# Altium PCB Complete.PcbDoc
Units mil, origin at the board's own origin, x right, y up, seen from the top; angles counter-clockwise.
Board outline 3476.38 x 2055.12 mil, 2 copper layers (Top Layer, Bottom Layer); 46 components, 14 nets, 138 pads, 274 vias.
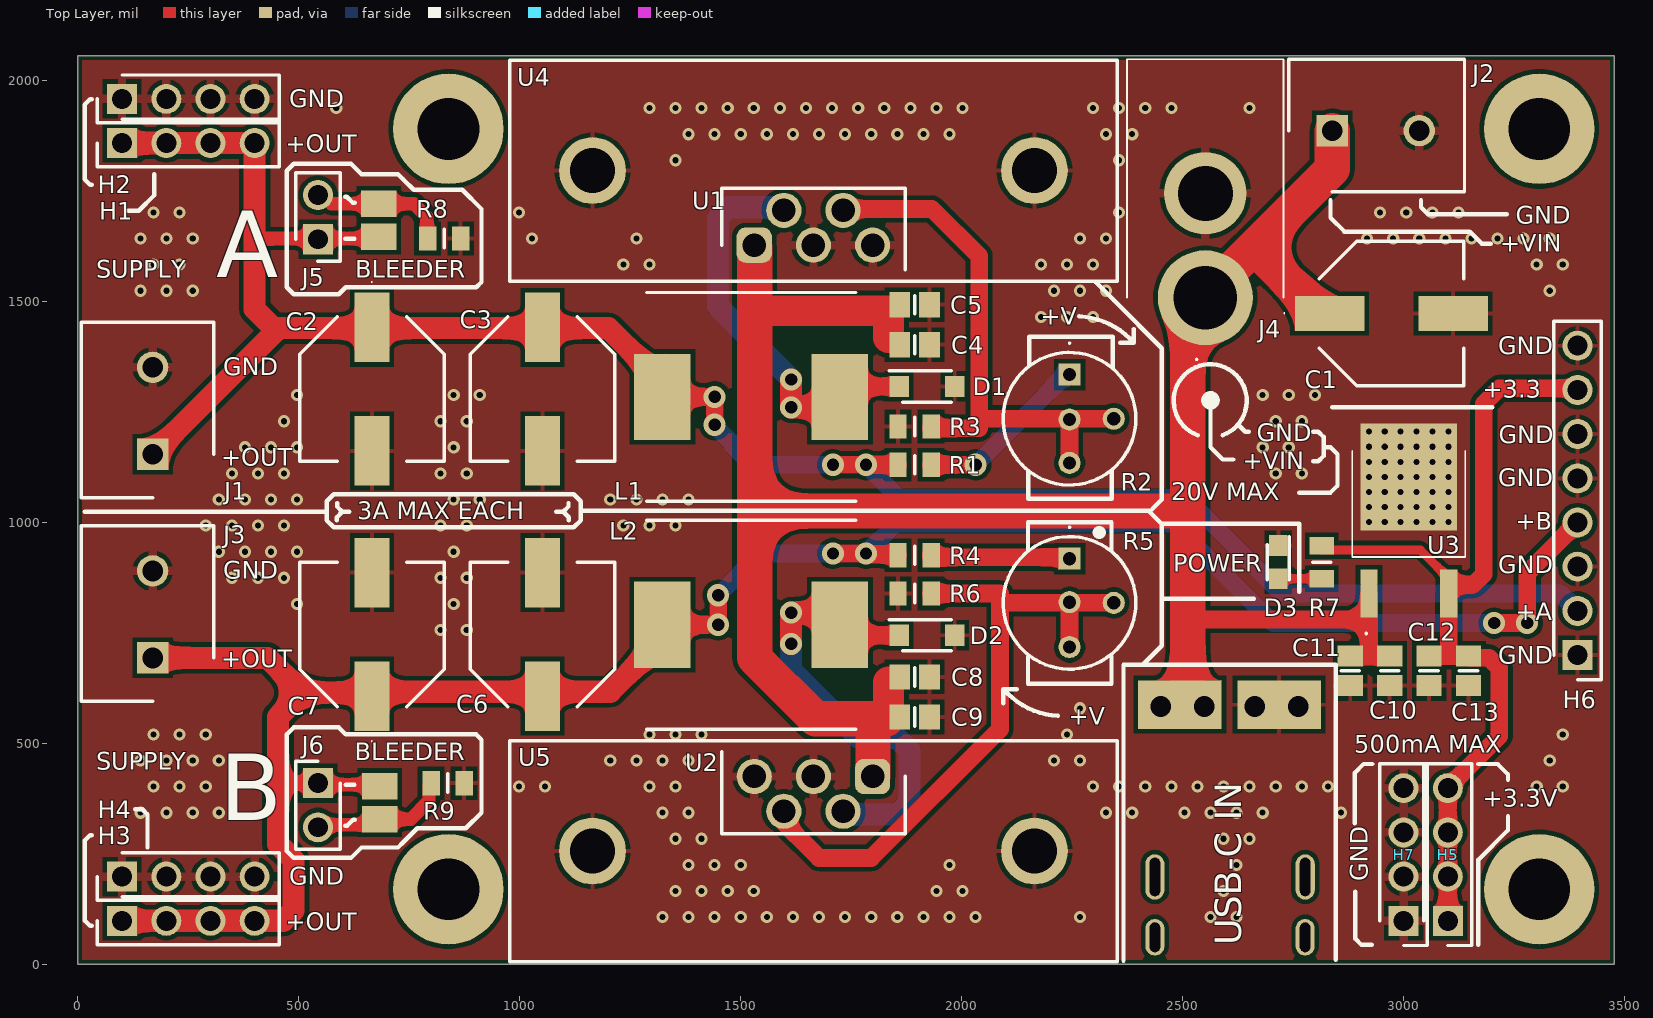
[diagram p0: Top Layer view]
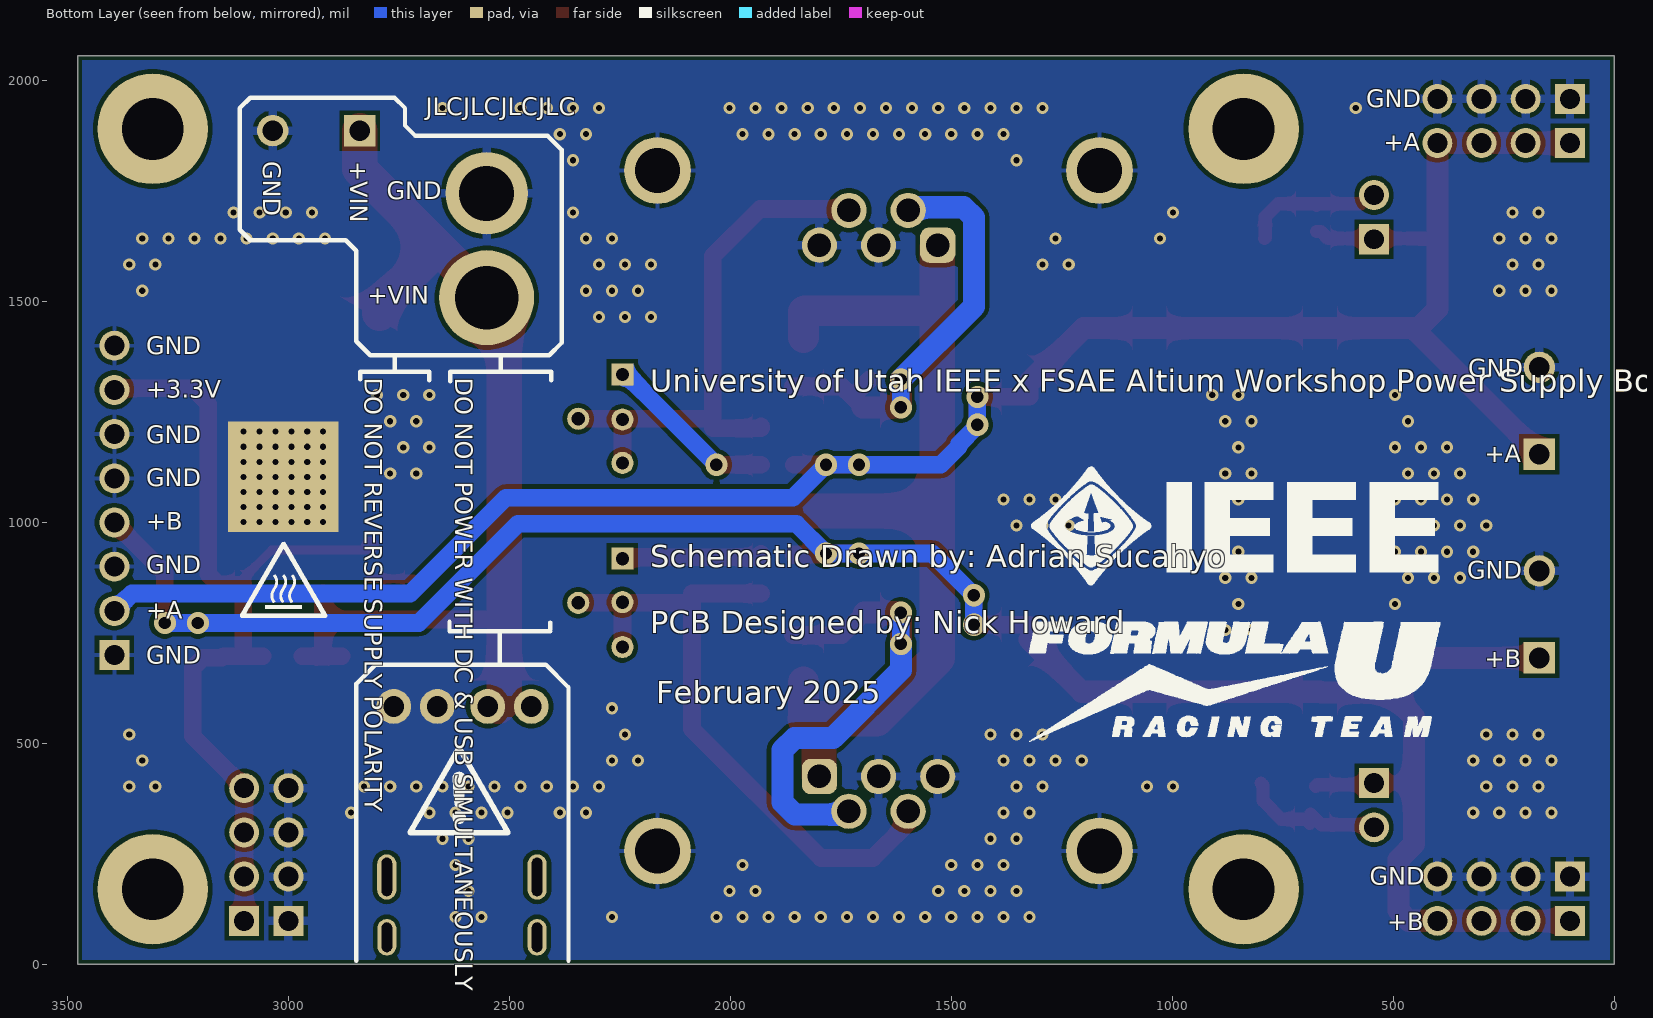
[diagram p1: Bottom Layer view, seen from below]
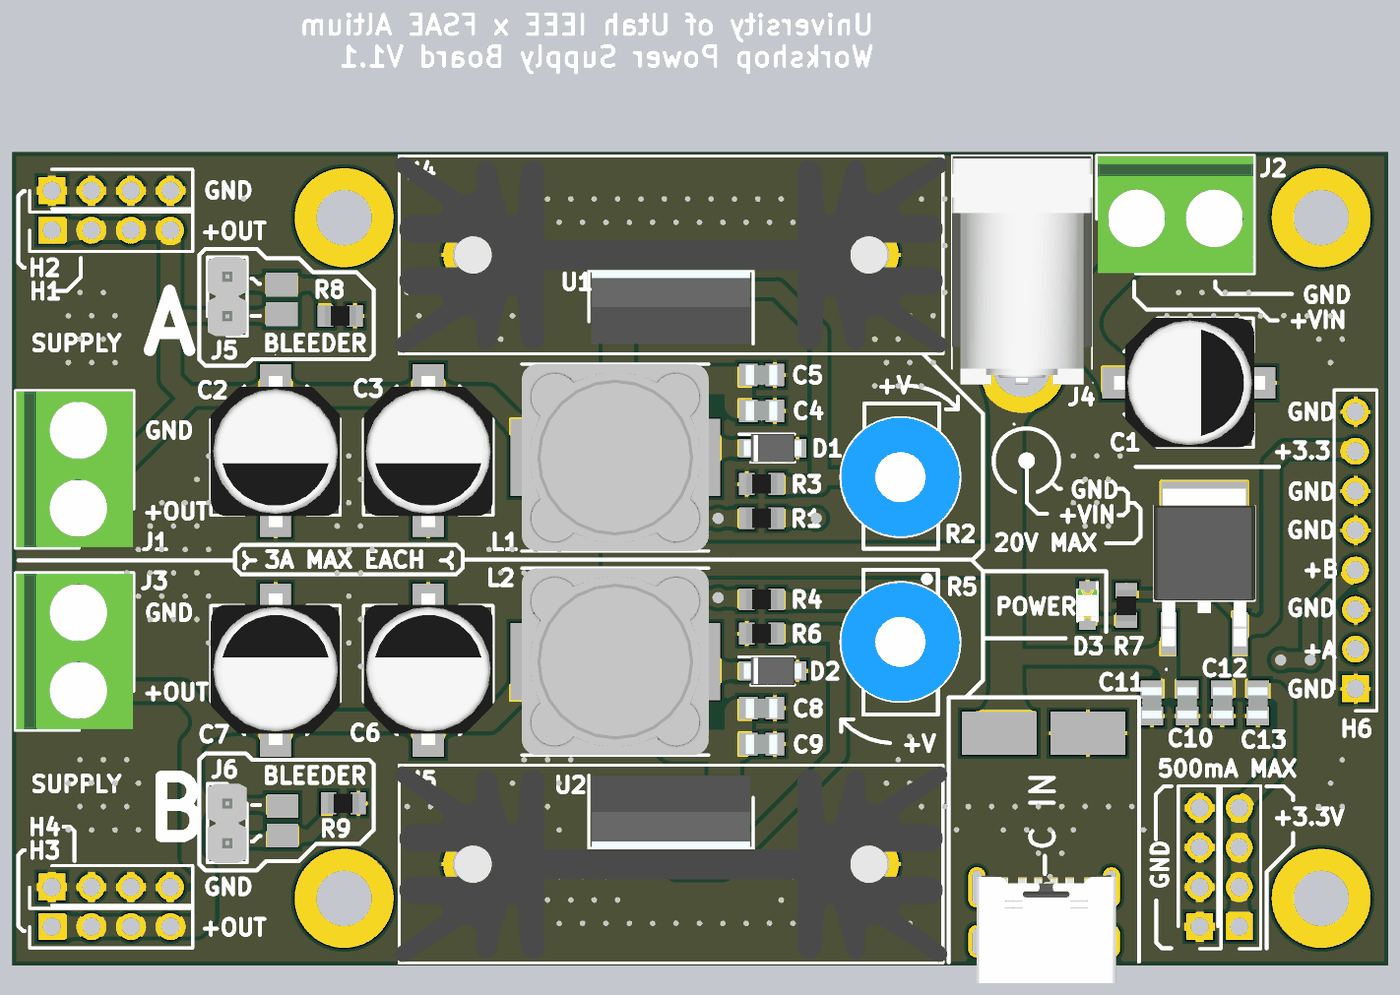
[diagram p2: 3D render of the assembled board from above, using the file's embedded part models]

## Layer stack, top to bottom
Top Solder: solder mask 0.4, Solder Resist, Dk 3.5
Top Layer: signal copper 1.4
Dielectric 1: dielectric 12.6, FR-4, Dk 4.8
Bottom Layer: signal copper 1.4
Bottom Solder: solder mask 0.4, Solder Resist, Dk 3.5

## Board outline
0,0 0,2055.12 3476.38,2055.12 3476.38,0

## Design rules (kind name [scope] priority, off if disabled: settings)
Clearance [All] p1: gap=10 ignorepadtopadclearanceinfootprint=TRUE except(0: Arc-Hole Track-Hole SMDPad-Hole THPad-Hole Via-Hole Fill-Hole Poly-Hole Region-Hole Text-Hole)
ComponentClearance [All] p1: gap=0 collisioncheckmode=3 verticalgap=10 showdistances=FALSE
Height [All] p1: minheight=0 maxheight=10000 prefheight=500
HoleSize [All] p1: absolutevalues=TRUE maxlimit=1000 minlimit=1 maxpercent=80.000 minpercent=20.000
PolygonConnect [All] p1: connectstyle=Relief reliefconductorwidth=10 reliefentries=4 polygonreliefangle="90 Angle" airgapwidth=10
RoutingVias [All] p1: holewidth=28 width=50 viastyle="Through Hole" minholewidth=28 minwidth=50 maxholewidth=28 maxwidth=50
SolderMaskExpansion [All] p1: expansion=4 istentingtop=FALSE
Width [All] p1: maxlimit=100 minlimit=10 preferedwidth=50
27 further rules are at their usual default settings.

## Components (designator, comment, footprint, x,y, rotation, side; value= is the part's Value field where it differs from the comment)
C1 "EEE-FN1V271UP" EEHZT1E331UP 2972.44,1472.44 r0 top
C2 "EEE-FN1V271UP" EEHZT1E331UP 665.35,1301.18 r270 top
C3 "EEE-FN1V271UP" EEHZT1E331UP 1051.18,1301.18 r270 top
C4 "1u" CAP0805 1893.31,1401.57 r0 top
C5 "100n" CAP0805 1893.31,1492.13 r0 top
C6 "EEE-FN1V271UP" EEHZT1E331UP 1051.18,746.06 r90 top
C7 "EEE-FN1V271UP" EEHZT1E331UP 665.35,746.06 r90 top
C8 "1u" CAP0805 1893.31,649.85 r0 top
C9 "100n" CAP0805 1893.31,559.06 r0 top
C10 "1u" CAP0805 2968.5,663.39 r270 top
C11 "100n" CAP0805 2879.27,663.39 r270 top
C12 "100n" CAP0805 3057.74,663.39 r270 top
C13 "1u" CAP0805 3146.98,663.39 r270 top
D1 "V3FM10-M3_H" DO-219AB 1921.26,1307.09 r0 top
D2 "V3FM10-M3_H" DO-219AB 1921.26,744.09 r0 top
D3 "LED" LEDM2012X80N 2716.54,909.45 r270 top
H1 "Header" Header_1X4 100,1857.9 r0 top
H2 "Header" Header_1X4 100,1957.9 r0 top
H3 "Header" Header_1X4 100,97.9 r0 top
H4 "Header" Header_1X4 100,197.9 r0 top
H5 "Header" Header_1X4 3100,97.9 r90 top
H6 "Header" Header_1X8 3393.7,699.21 r90 top
H7 "Header" Header_1X4 3000,97.9 r90 top
J1 "691137710002" SHDR2W70P0X500_1X2_1000X750X1160P 169.29,1153.54 r90 top
J2 "691137710002" SHDR2W70P0X500_1X2_1000X750X1160P 2838.58,1885.83 r0 top
J3 "691137710002" SHDR2W70P0X500_1X2_1000X750X1160P 169.29,692.91 r90 top
J4 "PJ-037AH" PJ037AH 2551.18,1507.87 r270 top
J5 "90120-0762" HDRV2W35P0X254_1X2_508X249X560P 543.31,1640.16 r90 top
J6 "90120-0762" HDRV2W35P0X254_1X2_508X249X560P 543.31,409.45 r270 top
L1 "SRR1210-151M" INDPM120120X1000N-D 1523.62,1283.46 r180 top
L2 "SRR1210-151M" INDPM120120X1000N-D 1523.62,767.72 r180 top
R1 "750" RESC0805 1893.31,1129.92 r0 top
R2 "50k" 3339P1103LF 2244.03,1334 r270 top
R3 "3.3k" RESC0805 1893.31,1216.54 r180 top
R4 "750" RESC0805 1893.31,925.2 r0 top
R5 "50k" 3339P1103LF 2244.09,917.32 r270 top
R6 "3.3k" RESC0805 1893.31,838.58 r180 top
R7 "750" RESC0805 2814.96,909.45 r270 top
R8 "3.3k" RESC0805 828.74,1641.73 r0 top
R9 "3.3k" RESC0805 836.61,409.45 r0 top
U1 "LM2576WT" TO-220-5 1530.63,1626.73 r0 top
U2 "LM2576WT" TO-220-5 1798.35,424.45 r180 top
U3 "UA78M33CKVURG3" TO-252-3 3011.81,838.58 r90 top
U4 "637-10ABPE" 63710ABPE 2164.49,1795.47 r180 top
U5 "637-10ABPE" 63710ABPE 1164.49,255.71 r0 top
"USB-C IN" "USB-PD" USB_C-PD 2395.41,649.85 r0 top (schematic designator M1)

## Footprints (in the part's own frame and the unit in brackets; to place one, negate y for a bottom-side part, rotate by r counter-clockwise, add the part's x,y. Pads: shape width x height; smd on the part's side, far side on the other; paste and mask are expansions set on the pad)
3339P1103LF [mil]
  rect 50x50 hole 30: 1(0,0)
  round 50 hole 30: 2(100,100) 3(200,0)
  silkscreen extent -73,-150 250,150, body extent -50,-150 250,150, height 253
63710ABPE [mm]
  round 3.84 hole 2.6: 1(0,0) 2(25.4,0)
  silkscreen extent -4.75,-6.35 30.15,6.35, body extent -5.03,-6.29 30.43,6.29, height 25.7
CAP0805 [mm] "Chip Capacitor, 2-Leads, Body 2.00x1.20mm, IPC Medium Density"
  rect 1.2x1.45 smd: 1(-0.85,0) 2(0.85,0)
  silkscreen extent 0,-0.53 0,0.53, body extent -1,-0.63 1,0.63, height 1.1
DO-219AB [mm]
  rect 1.12x1.22 smd: 1(-1.6,0) 2(1.6,0)
  silkscreen extent -2.16,-0.9 1.4,0.9, body extent -1.85,-0.9 1.85,0.9, height 1.08
EEHZT1E331UP [mm]
  rect 4x2 smd: 1(-3.55,0) 2(3.55,0)
  silkscreen extent -6.18,-4.15 4.15,4.15, body extent -4.79,-4.15 4.91,4.15, height 10.2
HDRV2W35P0X254_1X2_508X249X560P [mil]
  rect 68x68 hole 45: 1(0,0)
  round 68 hole 45: 2(100,0)
  silkscreen extent -50,-50 150,50, body extent -50,-49 150,49, height 361
Header_1X4 [mm]
  rect 1.725x1.725 hole 1.15: 1(0,0)
  round 1.725 hole 1.15: 2(2.54,0) 3(5.08,0) 4(7.62,0)
  silkscreen extent -1.42,-1.37 9.04,1.37
Header_1X8 [mm]
  rect 1.725x1.725 hole 1.15: 1(0,0)
  round 1.725 hole 1.15: 2(2.54,0) 3(5.08,0) 4(7.62,0) 5(10.16,0) 6(12.7,0) 7(15.24,0) 8(17.78,0)
  silkscreen extent -1.42,-1.37 19.18,1.37
INDPM120120X1000N-D [mm]
  rect 3.25x4.95 smd: 1(-5.1,0) 2(5.1,0)
  silkscreen extent -6,-6 6,6, body extent -6,-6 6,6, height 10
LEDM2012X80N [mm]
  rect 1.2x1.05 smd: 1(-0.95,0) 2(0.95,0)
  silkscreen extent -1.48,-0.63 1,0.63, body extent -1,-0.63 1,0.63, height 0.7
PJ037AH [mm]
  round 5.46 hole 3.64: 1(0,0)
  round 4.74 hole 3.16: 2(-6,0)
  silkscreen extent -13.7,-4.5 3.6,4.5, body extent -13.5,-4.5 1,4.5, height 11
RESC0805 [mm] "Chip Resistor, 2-Leads, Body 2.00x1.20mm, IPC Medium Density"
  rect 1x1.4 smd: 1(-0.95,0) 2(0.95,0)
  silkscreen extent 0,-0.53 0,0.53, body extent -1,-0.63 1,0.63, height 0.5
SHDR2W70P0X500_1X2_1000X750X1160P [mm]
  rect 1.8x1.8 hole 1.2: 1(0,0)
  round 1.8 hole 1.2: 2(5,0)
  silkscreen extent -2.5,-3.5 7.6,4.1, body extent -2.45,-3.45 7.55,4.05, height 11.5
TO-220-5 [mm]
  rrect50% 2.025x2.025 hole 1.35: 1(0,0)
  round 2.025 hole 1.35: 2(1.7,2) 3(3.4,0) 4(5.1,2) 5(6.8,0)
  silkscreen extent -1.87,-1.42 8.67,3.28, body extent -1.68,-1.42 8.48,3.28, height 17.61
TO-252-3 [mm]
  rect 2.75x1 smd: 1(0,2.29) 3(0,-2.29)
  rect 6.15x5.55 smd: 2(6.7,0)
  silkscreen extent -2.35,-3.25 8.2,3.25, body extent -0.81,-3.26 9.3,3.26, height 2.43
USB_C-PD [mm]
  round 2 hole 1.2: 1(1.4,-1.7) 1(3.9,-1.7) 2(6.8,-1.7) 2(9.3,-1.7)
  rect 4.8x2.8 smd: 1(2.5,-1.6) 2(8.2,-1.6)
  oval 1.1x2.6 hole 0.6 slot 2.2 at 90 deg: 3(1.06,-11.5) 6(9.7,-11.5)
  oval 1.1x2.1 hole 0.6 slot 1.7 at 90 deg: 4(1.062,-14.967) 5(9.698,-14.967)
  body extent 0,-17.64 10.7,0, height 4.96

## Part data
C1 C2 C3 C6 C7: "Capacitor Polarised", Manufacturer_Name=Panasonic, Mouser Part Number=667-EEE-FN1V271UP, Arrow Part Number=EEE-FN1V271UP, Arrow Price/Stock=https://www.arrow.com/en/products/eee-fn1v271up/panasonic, Datasheet Link=http://industrial.panasonic.com/cdbs/www-data/pdf/RDE0000/RDE0000C1259.pdf, Height=10.8mm, Manufacturer_Part_Number=EEE-FN1V271UP, Mouser Price/Stock=https://www.mouser.co.uk/ProductDetail/Panasonic/EEE-FN1V271UP/?qs=OlC7AqGiEDkrGQxqM1X3hg%3D%3D
C4 C5 C8 C9 C10 C11 C12 C13: library part "Capacitor - Non Polarized", "Non Polarized Capacitor"
D1 D2: "Schottky Diode", Arrow Part Number=V3FM10-M3/H, Manufacturer_Name=Vishay, Mouser Part Number=78-V3FM10-M3/H, Arrow Price/Stock=https://www.arrow.com/en/products/v3fm10-m3h/vishay, Datasheet Link=https://mouser.componentsearchengine.com/Datasheets/1/V3FM10-M3_H.pdf, Height=1.08mm, Manufacturer_Part_Number=V3FM10-M3/H, Mouser Price/Stock=https://www.mouser.co.uk/ProductDetail/Vishay-General-Semiconductor/V3FM10-M3-H?qs=F5EMLAvA7IChj%2FkhLK3e0A%3D%3D
D3: "General Purpose LED", ComponentLink1Description=Datasheet, ComponentLink1URL=https://www.smc-diodes.com/propdf/1N4148W%20N0571%20REV.E.pdf
H1 H2 H3 H4 H5 H7: library part "4-Pin Header", "4-Pin Header"
H6: library part "8-Pin Header", "8-Pin Header", System=Connector
J1 J2 J3: "Connector", Manufacturer_Name="Wurth Elektronik", Mouser Part Number=710-691137710002, Datasheet Link=https://katalog.we-online.com/em/datasheet/691137710002.pdf, Height=11.6mm, Manufacturer_Part_Number=691137710002, Mouser Price/Stock=https://www.mouser.co.uk/ProductDetail/Wurth-Elektronik/691137710002?qs=lBTPRtX1sU9LnHBbviNKGA%3D%3D
J4: "Connector", Manufacturer_Name="Same Sky", Mouser Part Number=490-PJ-037AH, Arrow Part Number=PJ-037AH, Arrow Price/Stock=https://www.arrow.com/en/products/pj-037ah/cui-devices?region=nac, Datasheet Link=https://www.arrow.com/en/products/pj-037ah/cui-devices, Height=11.2mm, Manufacturer_Part_Number=PJ-037AH, Mouser Price/Stock=https://www.mouser.co.uk/ProductDetail/CUI-Devices/PJ-037AH?qs=WyjlAZoYn50M7m1AkzfPaQ%3D%3D
J5 J6: "Connector", Manufacturer_Name=Molex, Mouser Part Number=538-90120-0762, Arrow Part Number=90120-0762, Arrow Price/Stock=https://www.arrow.com/en/products/90120-0762/molex?region=nac, Datasheet Link=http://www.molex.com/pdm_docs/sd/901200762_sd.pdf, Height=5.6mm, Manufacturer_Part_Number=90120-0762, Mouser Price/Stock=https://www.mouser.co.uk/ProductDetail/Molex/90120-0762?qs=NKHyz0HolODkarWFh2VFww%3D%3D
L1 L2: "Inductor", Manufacturer_Name=Bourns, Mouser Part Number=652-SRR1210-151M, Arrow Part Number=SRR1210-151M, Arrow Price/Stock=https://www.arrow.com/en/products/srr1210-151m/bourns?region=nac, Datasheet Link=https://www.bourns.com/docs/Product-Datasheets/SRR1210.pdf, Height=10mm, Manufacturer_Part_Number=SRR1210-151M, Mouser Price/Stock=https://www.mouser.co.uk/ProductDetail/Bourns/SRR1210-151M?qs=4vvWAaIu%2Fq7S1x5W5meWRQ%3D%3D
R1 R3 R4 R6 R7 R8 R9: library part Resistor, "Resistor"
R2 R5: library part Potentiometer, "Potentionmeter"
U1 U2: "Integrated Circuit", Arrow Part Number=LM2576-5.0WU-TR, Manufacturer_Name=Microchip, Manufacturer_Part_Number=LM2576WU-TR, Mouser Part Number=998-LM2576WT, Arrow Price/Stock=https://www.arrow.com/en/products/lm2576-5.0wu-tr/microchip-technology?region=nac, Datasheet Link=http://ww1.microchip.com/downloads/en/DeviceDoc/lm2576.pdf, Mouser Price/Stock=https://www.mouser.co.uk/ProductDetail/Microchip-Technology/LM2576-5.0WU-TR?qs=Y3Q3JoKAO1SBuj%2FVzZkeQA%3D%3D
U3: "Linear Voltage Regulator", Manufacturer_Name="Texas Instruments", Mouser Part Number=595-UA78M33CKVURG3, Arrow Part Number=UA78M33CKVURG3, Arrow Price/Stock=https://www.arrow.com/en/products/ua78m33ckvurg3/texas-instruments?region=nac, Datasheet Link=https://www.ti.com/lit/gpn/ua78m?HQS=ti-null-null-sf-df-pf-sep-wwe&DCM=yes, Height=2.52mm, Manufacturer_Part_Number=UA78M33CKVURG3, Mouser Price/Stock=https://www.mouser.co.uk/ProductDetail/Texas-Instruments/UA78M33CKVURG3?qs=0O%2FZFlpUpJXrDg4gfD1Q2g%3D%3D
U4 U5: "Undefined or Miscellaneous", Manufacturer_Name="Wakefield Thermal", Mouser Part Number=567-637-10ABPE, Datasheet Link=https://media.digikey.com/pdf/Data%20Sheets/Wakefield%20Thermal%20PDFs/634%20Heat%20Sinks.pdf, Height=25.4mm, Manufacturer_Part_Number=637-10ABPE, Mouser Price/Stock=https://www.mouser.co.uk/ProductDetail/Wakefield-Vette/637-10ABPE?qs=1%252ByrAFyf4wFy1bU0h8s7wA%3D%3D

## Free pads (board coordinates)
  round 250 hole 140: 7(838.58,169.29) 7(838.58,1889.76) 7(3307.09,169.29) 7(3307.09,1889.76)
  rect 250x250 smd far side: 8(3011.81,1102.36)
  round 50 hole 30: 10(2244.09,818.9) 10(2244.09,1232.28)
  rect 80x60 smd mask+2: 11(681.1,1720.47) 11(681.1,1645.67) 11(683.06,402.57) 11(683.06,327.77)

## Via types
v1: diameter 27.56, hole 13.78, Top Layer to Bottom Layer, tented both sides, 259 vias
v2: diameter 50, hole 28, Top Layer to Bottom Layer, tented both sides, 15 vias

## Nets (pads, with @x,y where several pads share a name; then routed paths per layer and width w, separated by ;. In a path a pad name is that pad's centre, name@x,y a point inside that pad or via, vN(x,y) a via of type N, cw(c..) or ccw(c..) an arc to the next point about the centre after c; other vN are vias at no path point)
+3.3: C12.1 C13.1 H5.1 H5.2 H5.3 H5.4 H6.7 R7.1 U3.3 | length 1988.2
  Top Layer w20: R7.1 2824.65,937.17 2844.08,937.17 2844.24,937.01 3037.99,937.01 3101.97,873.03 3101.97,858.14 U3.3
  Top Layer w40: R7.1 R7.1@2815.28,946.54 ; C12.1 3102.36,696.85 ; H5.1 H5.2 H5.3 H5.4 3100,399.21 3216.54,515.75 3216.54,669.8 3193.1,693.23 3150.6,693.23 C13.1 3102.36,696.85 ; U3.3 3101.97,697.24 3102.36,696.85 ; U3.3@3101.97,858.14 3102.28,858.46 3157.67,858.46 3181.1,881.89 3181.1,1267.72 3216.54,1303.15 3389.76,1303.15 H6.7
GND: "USB-C IN.2" C1.2 C2.2 C3.2 C4.2 C5.2 C6.2 C7.2 C8.2 C9.2 C10.2 C11.2 C12.2 C13.2 D1.2 D2.2 D3.1 H2.1 H2.2 H2.3 H2.4 H4.1 H4.2 H4.3 H4.4 H6.1 H6.3 H6.5 H6.6 H6.8 H7.1 H7.2 H7.3 H7.4 J1.2 J2.2 J3.2 J4.2 pad.8 R3.2 R6.2 R8.2 R9.2 U1.3 U1.5 U2.3 U2.5 U3.2 U4.1 U4.2 U5.1 U5.2
  other v1: 1322.83,106.3 1381.89,106.3 1440.94,106.3 1500,106.3 1559.05,106.3 1618.11,106.3 1677.16,106.3 1736.22,106.3 1795.27,106.3 1854.33,106.3 1913.39,106.3 1972.44,106.3 2031.5,106.3 2267.72,106.3 2562.99,106.3 2622.05,106.3 1352.36,165.35 1411.42,165.35 1470.47,165.35 1529.53,165.35 1942.91,165.35 2001.97,165.35 2592.52,165.35 1381.89,224.41 1440.94,224.41 1500,224.41 1972.44,224.41 2622.05,224.41 1352.36,283.46 1411.42,283.46 2592.52,283.46 2651.57,283.46 141.73,342.52 200.79,342.52 259.84,342.52 318.9,342.52 1322.83,342.52 1381.89,342.52 2326.77,342.52 2385.83,342.52 2503.94,342.52 2562.99,342.52 2622.05,342.52 2681.1,342.52 2858.27,342.52 171.26,401.57 230.31,401.57 289.37,401.57 998.03,401.57 1057.09,401.57 1293.31,401.57 1352.36,401.57 2297.24,401.57 2356.3,401.57 2415.35,401.57 2474.41,401.57 2533.46,401.57 2592.52,401.57 2651.57,401.57 2710.63,401.57 2769.68,401.57 2828.74,401.57 3301.18,401.57 3360.23,401.57 141.73,460.63 200.79,460.63 259.84,460.63 318.9,460.63 1204.72,460.63 1263.78,460.63 1322.83,460.63 1381.89,460.63 2208.66,460.63 2267.72,460.63 3330.71,460.63 171.26,519.68 230.31,519.68 289.37,519.68 1293.31,519.68 1352.36,519.68 1411.42,519.68 2238.19,519.68 3360.23,519.68 2267.72,578.74 820.87,755.9 879.92,755.9 496.06,814.96 850.39,814.96 348.42,874.02 407.48,874.02 466.54,874.02 820.87,874.02 879.92,874.02 318.9,933.07 377.95,933.07 437.01,933.07 496.06,933.07 850.39,933.07 289.37,992.13 348.42,992.13 407.48,992.13 466.54,992.13 820.87,992.13 879.92,992.13 1234.25,992.13 1293.31,992.13 1352.36,992.13 2921.26,1000 2957.28,1000 2993.31,1000 3029.33,1000 3065.35,1000 3101.38,1000 2921.26,1034.13 2957.28,1034.13 2993.31,1034.13 3029.33,1034.13 3065.35,1034.13 3101.38,1034.13 318.9,1051.18 377.95,1051.18 437.01,1051.18 496.06,1051.18 850.39,1051.18 909.45,1051.18 1204.72,1051.18 1263.78,1051.18 1322.83,1051.18 1381.89,1051.18 2921.26,1068.25 2957.28,1068.25 2993.31,1068.25 3029.33,1068.25 3065.35,1068.25 3101.38,1068.25 2921.26,1102.38 2957.28,1102.38 2993.31,1102.38 3029.33,1102.38 3065.35,1102.38 3101.38,1102.38 348.42,1110.24 407.48,1110.24 466.54,1110.24 820.87,1110.24 879.92,1110.24 2710.63,1110.24 2769.68,1110.24 2921.26,1136.5 2957.28,1136.5 2993.31,1136.5 3029.33,1136.5 3065.35,1136.5 3101.38,1136.5 377.95,1169.29 437.01,1169.29 496.06,1169.29 850.39,1169.29 2681.1,1169.29 2740.16,1169.29 2921.26,1170.63 2957.28,1170.63 2993.31,1170.63 3029.33,1170.63 3065.35,1170.63 3101.38,1170.63 2921.26,1204.76 2957.28,1204.76 2993.31,1204.76 3029.33,1204.76 3065.35,1204.76 3101.38,1204.76 466.54,1228.35 820.87,1228.35 879.92,1228.35 2710.63,1228.35 2769.68,1228.35 496.06,1287.4 850.39,1287.4 909.45,1287.4 2681.1,1287.4 2740.16,1287.4 2799.21,1287.4 2179.13,1464.57 2238.19,1464.57 2297.24,1464.57 141.73,1523.62 200.79,1523.62 259.84,1523.62 2208.66,1523.62 2267.72,1523.62 2326.77,1523.62 3330.71,1523.62 171.26,1582.68 230.31,1582.68 1234.25,1582.68 1293.31,1582.68 2179.13,1582.68 2238.19,1582.68 2297.24,1582.68 3301.18,1582.68 3360.23,1582.68 141.73,1641.73 200.79,1641.73 259.84,1641.73 1027.56,1641.73 1263.78,1641.73 2267.72,1641.73 2326.77,1641.73 2917.32,1641.73 2976.38,1641.73 3035.43,1641.73 3094.49,1641.73 3153.54,1641.73 3212.6,1641.73 3271.65,1641.73 3330.71,1641.73 171.26,1700.79 230.31,1700.79 998.03,1700.79 2356.3,1700.79 2946.85,1700.79 3005.9,1700.79 3064.96,1700.79 3124.01,1700.79 1352.36,1818.9 2356.3,1818.9 1381.89,1877.95 1440.94,1877.95 1500,1877.95 1559.05,1877.95 1618.11,1877.95 1677.16,1877.95 1736.22,1877.95 1795.27,1877.95 1854.33,1877.95 1913.39,1877.95 1972.44,1877.95 2326.77,1877.95 2385.83,1877.95 584.65,1937.01 1293.31,1937.01 1352.36,1937.01 1411.42,1937.01 1470.47,1937.01 1529.53,1937.01 1588.58,1937.01 1647.64,1937.01 1706.69,1937.01 1765.75,1937.01 1824.8,1937.01 1883.86,1937.01 1942.91,1937.01 2001.97,1937.01 2297.24,1937.01 2356.3,1937.01 2415.35,1937.01 2474.41,1937.01 2651.57,1937.01
NetD1_1: D1.1 L1.1 U1.2 | length 1047.3
  Top Layer w40: L1.1@1685.04,1322.83 L1.1 ; L1.1@1700.79,1259.84 L1.1 ; D1.1 1748.03,1307.09 L1.1
  Top Layer w50: v2(1614.17,1322.83) v2(1614.17,1259.84) L1.1@1700.79,1259.84
  Bottom Layer w40: v2(1614.17,1259.84) v2(1614.17,1322.83)
  Bottom Layer w50: U1.2@1606.3,1712.6 1472.25,1712.6 1448.82,1689.17 1448.82,1488.19 v2(1614.17,1322.83)
NetD2_1: D2.1 L2.1 U2.2 | length 1092.2
  Top Layer w40: L2.1@1696.85,795.28 L2.1 1748.03,744.09 D2.1
  Top Layer w50: v2(1614.17,724.41) v2(1614.17,795.28) L2.1@1696.85,795.28
  Bottom Layer w40: v2(1614.17,724.41) v2(1614.17,795.28) ; U2.2 U2.2@1739.02,338.11
  Bottom Layer w50: v2(1614.17,724.41) 1614.17,665.35 1767.72,511.81 1854.33,511.81 1881.89,484.25 1881.89,366.14 1853.86,338.11 U2.2@1739.02,338.11
NetD3_2: D3.2 R7.2 | length 98.4
  Top Layer w20: D3.2 R7.2
NetJ5_2: J5.2 pad.11@681.1,1720.47 R8.1 | length 319.7
  Top Layer w30: J5.2 553.59,1740.16 573.28,1720.47 669.29,1720.47 673.23,1716.54 677.17,1720.47 759.84,1720.47 789.52,1690.8 789.52,1643.55 R8.1
NetJ6_2: J6.2 pad.11@683.06,327.77 R9.1 | length 339.3
  Top Layer w30: J6.2 548.82,314.96 662.38,314.96 675.18,327.77 pad.11@686.89,339.48 ; pad.11@680.11,327.77 pad.11@688.98,318.9 ; pad.11@683.06,327.77 752.97,327.77 794.53,369.33 794.53,404.76 R9.1
NetR1_2: R1.2 R2.1 | length 396.6
  Top Layer w40: R1.2 v2(2031.5,1129.92)
  Bottom Layer w40: v2(2031.5,1129.92) 2227.28,1325.71 2239.09,1325.71 R2.1@2244.09,1330.71
NetR2_2: pad.10@2244.09,1232.28 R2.2 R2.3 R3.1 U1.4 | length 1260.1
  Top Layer w40: U1.4@1732.17,1708.66 1931.57,1708.66 ; R3.1 1930.71,1212.91 1931.02,1212.6 2039.37,1212.6 2039.37,1236.22 ; 1932.32,1709.41 2039.37,1602.36 2039.37,1236.22 ; R2.3@2244.09,1130.71 pad.10@2244.09,1232.28 ; R2.2 2041.59,1234 2039.37,1236.22
NetR4_2: R4.2 R5.1 | length 321.5
  Top Layer w40: R4.2@1930.71,928.82 R4.2 1930.71,920.79 1931.02,920.47 R5.1@2244.09,920.47
NetR5_2: pad.10@2244.09,818.9 R5.2 R5.3 R6.1 U2.4 | length 1491.7
  Top Layer w40: U2.4 1605.16,338.11 1605.16,312.16 1677.17,240.16 1795.28,240.16 2086.61,531.5 2086.61,814.96 ; R6.1 2086.61,838.58 2086.61,814.96 ; R5.3 pad.10@2244.09,817.32 ; pad.10@2244.09,818.9 pad.10@2244.09,817.32 ; R5.2 pad.10@2244.09,817.32 ; 2086.61,814.96 2088.98,817.32 pad.10@2244.09,817.32
V_IN: "USB-C IN.1" C1.1 C4.1 C5.1 C8.1 C9.1 C10.1 C11.1 J2.1 J4.1 U1.1 U2.1 U3.1 | length 5146.1
  Top Layer w40: 2511.81,771.65 2519.69,779.53 2921.65,779.53 ; C11.1 C10.1 ; 2921.65,697.24 2921.65,779.53 ; U3.1 2921.65,779.53
  Top Layer w70: 1543.31,1478.35 1832.68,1478.35 1834.65,1476.38 1834.65,1417.32 ; 1830.71,555.12 1834.65,559.06 1834.65,637.8 ; J4.1 J4.1@2586.61,1507.87 ; 2645.67,1600.39 2645.67,1606.3
  Top Layer w80: U1.1@1531.5,1622.05 1531.5,1025.36 ; U2.1@1799.21,425.32 1799.21,551.18 ; 1830.71,555.12 1669.29,555.12 1531.5,692.91 1531.5,1025.36 ; J4.1@2511.81,1507.87 2511.81,1027.56 ; 2525.33,582.92 2511.81,596.44 2511.81,771.65 2511.81,1027.56 ; J4.1@2547.24,1507.87 2645.67,1606.3 2661.42,1622.05 ; C1.1@2793.94,1473.07 2793.94,1489.53 2661.42,1622.05 ; J2.1 2838.58,1799.21 2661.42,1622.05 ; 1531.5,1025.36 2509.62,1025.36 2511.81,1027.56
VCC_1: C2.1 C3.1 H1.1 H1.2 H1.3 H1.4 H6.2 J1.1 J5.1 L1.2 pad.11@681.1,1645.67 R1.1 | length 4902.9
  Top Layer w30: 400,1641.73 J5.1@541.73,1641.73 ; J5.1@544.88,1641.73 647.48,1641.73 663.23,1657.48 pad.11@673.23,1657.48
  Top Layer w40: J5.1@541.73,1641.73 J5.1 ; L1.2@1322.83,1316.93 L1.2 v2(1440.94,1283.46) v2(1440.94,1220.47) ; v2(1708.66,1129.92) v2(1783.46,1129.92) R1.1
  Top Layer w50: H1.1 H1.2 H1.3 H1.4 400,1641.73 400,1481.89 448.82,1433.07 ; J1.1 454.72,1438.98 1200.79,1438.98 L1.2@1322.83,1316.93
  Bottom Layer w40: v2(1440.94,1283.46) v2(1440.94,1220.47) 1440.94,1217.77 1482.97,1175.74 1482.97,1170.57 1523.62,1129.92 v2(1708.66,1129.92) v2(1783.46,1129.92) 1858.27,1055.12 2507.87,1055.12 2724.41,838.58 3354.33,838.58 H6.2
VCC_2: C6.1 C7.1 H3.1 H3.2 H3.3 H3.4 H6.4 J3.1 J6.1 L2.2 pad.11@683.06,402.57 R4.1 | length 5167.6
  Top Layer w30: 452.76,409.45 J6.1 546.75,406.01 671.74,406.01 pad.11@675.18,402.57
  Top Layer w40: C7.1@663.39,614.17 C7.1@665.35,616.14 ; L2.2@1322.83,734.25 L2.2 v2(1448.82,767.72) v2(1448.82,834.65) ; v2@1704.72,929.13 v2(1708.66,929.13) 1771.65,929.13 1773.57,927.22 1855.59,927.22 1855.91,926.91 R4.1 ; v2(3204.72,771.65) v2(3279.53,771.65) 3279.53,885.04 H6.4
  Top Layer w50: H3.1 H3.2 H3.3 H3.4 464.76,97.9 488.19,121.33 488.19,236.22 452.76,271.65 452.76,409.45 452.76,559.06 507.87,614.17 ; J3.1 429.13,692.91 507.87,614.17 ; C7.1@663.39,614.17 507.87,614.17 ; C7.1@665.35,616.14 1204.72,616.14 L2.2@1322.83,734.25
  Bottom Layer w40: v2(1448.82,767.72) v2(1448.82,834.65) 1543.31,929.13 v2(1708.66,929.13) 1771.65,929.13 v2@1773.57,931.05 ; v2(1783.46,929.13) 1850.37,996.04 2480.34,996.04 2704.72,771.65 v2(3204.72,771.65) v2(3279.53,771.65)
pads on no net: "USB-C IN.3" "USB-C IN.4" "USB-C IN.5" "USB-C IN.6"

## Polygon pours and split planes (outlines as drawn)
GND on Bottom Layer "GND_L02_P002" (solid, pour order 2): 10,10 10,2045.12 3466.38,2045.12 3466.38,10
GND on Top Layer "GND_L01_P001" (solid, pour order 1): 10,10 10,2045.12 3466.38,2045.12 3466.38,10

## Silkscreen, mask and mechanical layers (free items; w line width, h text height)
Top Overlay:
  drawing of 161 lines, arcs and shapes, not listed
  text "GND" at 478.5,1939.13 h40
  text "+OUT" at 470.63,1836.77 h40
  text "GND" at 3254.09,1675.35 h40
  text "+VIN" at 3218.66,1612.36 h40
  text "SUPPLY" at 41.5,1553.31 h40
  text "A" at 313.46,1553.62 h150
  text "BLEEDER" at 628.11,1553.31 h40
  text "+V" at 2179.29,1447.01 h40
  text "GND" at 3214.72,1380.08 h40
  text "GND" at 328.9,1332.83 h40
  text "+3.3" at 3179.29,1281.65 h40
  text "GND" at 2667.48,1183.23 h40
  text "GND" at 3215.42,1178.52 h40
  text "+OUT" at 324.96,1128.11 h40
  text "+VIN" at 2635.98,1120.24 h40
  text "GND" at 3214.72,1080.87 h40
  text "20V MAX" at 2474.57,1049.37 h40
  text "3A MAX EACH" at 632.05,1006.06 h40
  text "+B" at 3254.09,982.44 h40
  text "POWER" at 2478.5,887.95 h40
  text "GND" at 3214.72,884.02 h40
  text "GND" at 328.9,872.2 h40
  text "+A" at 3254.09,777.72 h40
  text "GND" at 3214.72,679.29 h40
  text "+OUT" at 324.96,671.42 h40
  text "+V" at 2242.28,541.5 h40
  text "500mA MAX" at 2887.95,478.5 h40
  text "BLEEDER" at 627.08,460.68 h40
  text "SUPPLY" at 41.5,439.13 h40
  text "+3.3V" at 3179.29,356.46 h40
  text "B" at 321.34,325.28 h150
  text "GND" at 2919.13,187.17 h40 r90
  text "GND" at 478.5,179.29 h40
  text "+OUT" at 470.63,76.93 h40
Bottom Overlay:
  drawing of 74 lines, arcs and shapes, not listed
  text "GND" at 560.87,1939.13 h40
  text "JLCJLCJLCJLC" at 2688.98,1921.26 h40
  text "+A" at 521.5,1840.71 h40
  text "+VIN" at 2860.08,1816.77 h40 r90
  text "GND" at 3056.93,1816.77 h40 r90
  text "GND" at 2777.4,1730.47 h40
  text "+VIN" at 2820.71,1494.25 h40
  text "GND" at 3321.4,1380.08 h40
  text "GND" at 329.63,1329.52 h40
  text "DO NOT POWER WITH DC & USB SIMULTANEOUSLY" at 2622.05,1326.77 h40 r90
  text "DO NOT REVERSE SUPPLY POLARITY" at 2826.77,1326.77 h40 r90
  text "University of Utah IEEE x FSAE Altium Workshop Power Supply Board V1.1" at 2181.1,1295.28 h50
  text "+3.3V" at 3321.4,1281.65 h40
  text "GND" at 3321.4,1178.52 h40
  text "+A" at 293.15,1135.98 h40
  text "GND" at 3321.4,1080.87 h40
  text "+B" at 3321.4,982.44 h40
  text "GND" at 3321.4,884.02 h40
  text "GND" at 332.52,872.2 h40
  text "+A" at 3321.4,781.65 h40
  text "Schematic Drawn by: Adrian Sucahyo /  / PCB Designed by: Nick Howard" at 2181.1,748.03 h50
  text "GND" at 3321.4,679.29 h40
  text "+B" at 293.15,671.42 h40
  text "February 2025" at 2167.17,589.65 h50
  text "GND" at 552.99,179.29 h40
  text "+B" at 513.62,76.93 h40